# Altium PCB LPCB222R0.PcbDoc
Units mm, origin at the board's own origin, x right, y up, seen from the top; angles counter-clockwise.
Board outline 58 x 58 mm, 2 copper layers (Top Layer, Bottom Layer); 35 components, 25 nets, 97 pads, 26 vias.
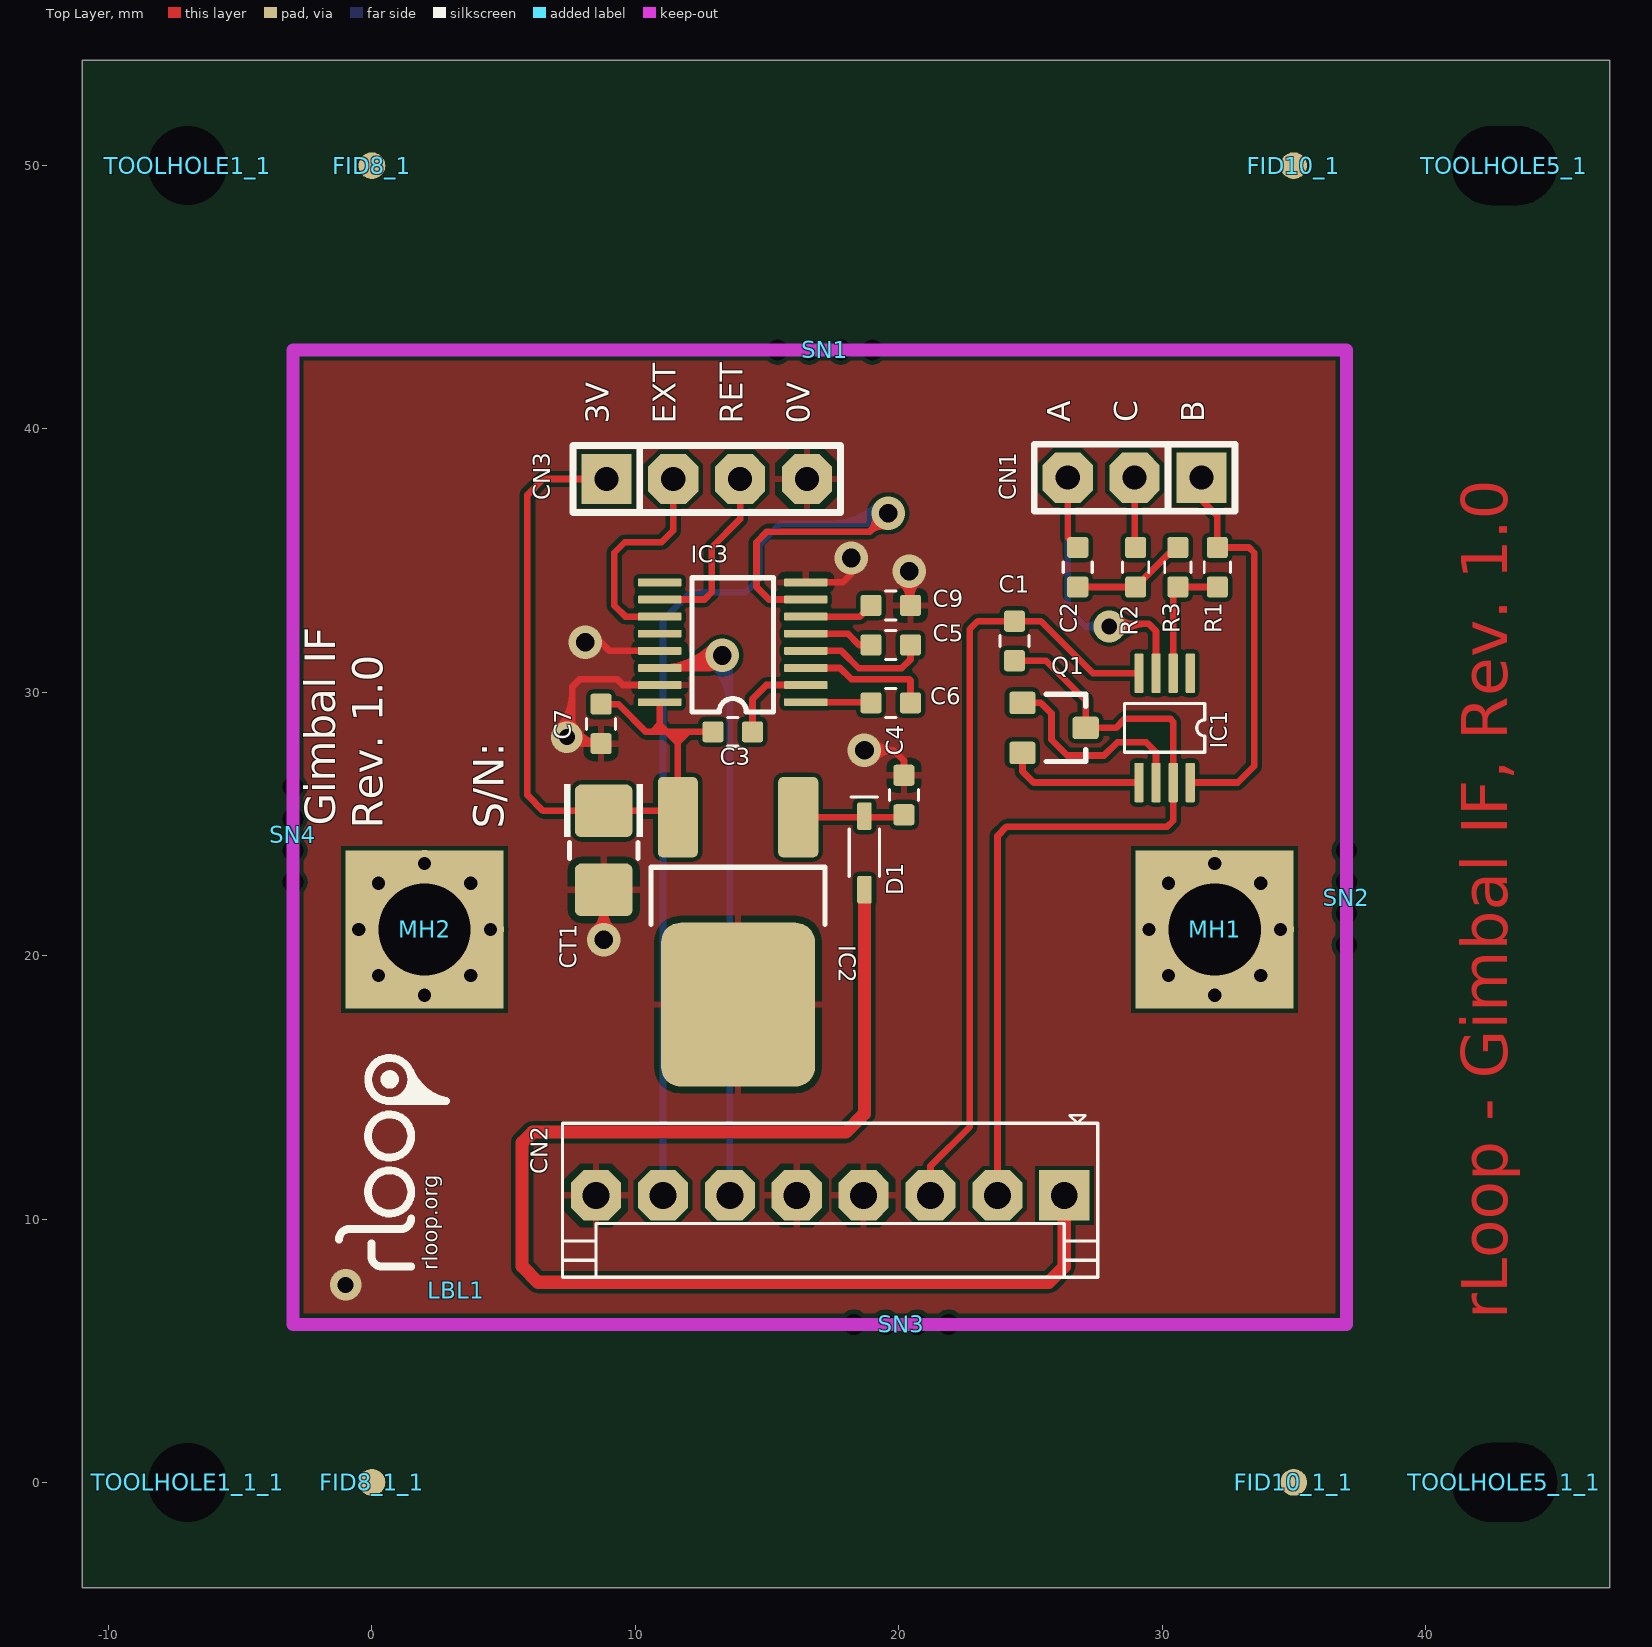
[diagram p0: Top Layer view]
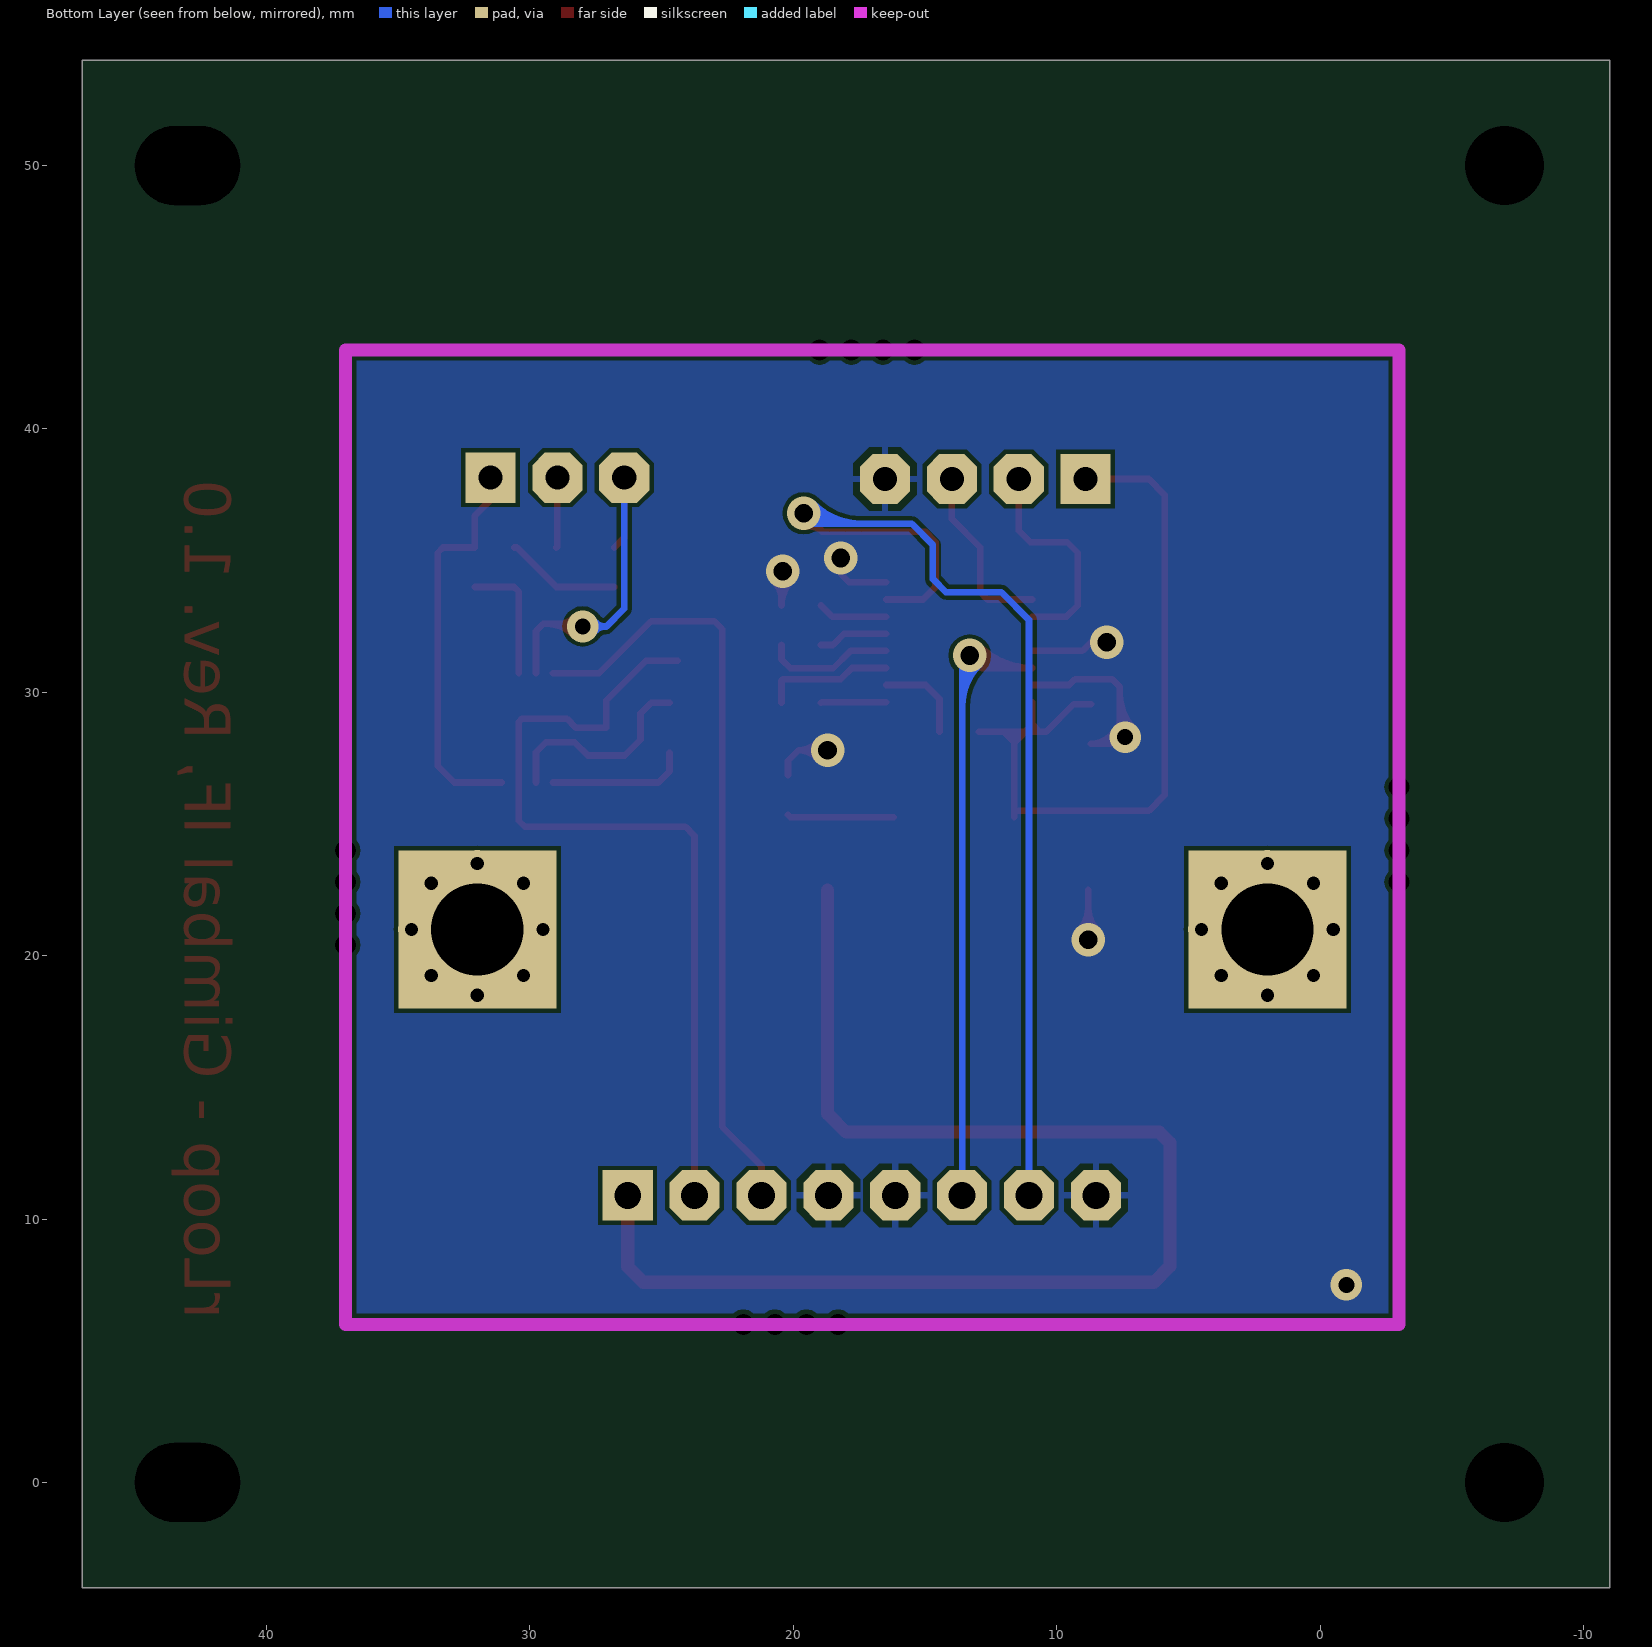
[diagram p1: Bottom Layer view, seen from below]

## Layer stack, top to bottom
Top Layer: signal copper 0.0356
Dielectric: core 0.32, FR-4, Dk 4.8
Bottom Layer: signal copper 0.0356

## Board outline
-11,-4 47,-4 47,54 -11,54

## Design rules (kind name [scope] priority, off if disabled: settings)
Clearance [All] p1: gap=0.16
HoleSize [All] p1: absolutevalues=TRUE maxlimit=5 minlimit=0.025 maxpercent=80.000 minpercent=20.000
MinimumSolderMaskSliver [All] p1 off: minsoldermaskwidth=0.1
PlaneClearance [All] p1: clearance=0.6
PolygonConnect [IsVia] p1: connectstyle=Direct reliefconductorwidth=0.254 reliefentries=4 polygonreliefangle="90 Angle" airgapwidth=0.254
PolygonConnect PolygonConnect_1 [All] p2: connectstyle=Relief reliefconductorwidth=0.254 reliefentries=4 polygonreliefangle="90 Angle" airgapwidth=0.254
RoomDefinition "U_LPCB222 - LINEAR POT" [InComponentClass('U_LPCB222 - LINEAR POT')] p1: confinementstyle=ConfineIn formatcopy=TRUE lockcomponents=FALSE outline 23.3,25.25 33.4,25.25 33.4,41.15 23.3,41.15
RoomDefinition "LPCB222 - OVERVIEW" [InComponentClass('LPCB222 - OVERVIEW')] p2: confinementstyle=ConfineIn formatcopy=TRUE lockcomponents=FALSE outline 54.189,-2.579 60.789,-2.579 60.789,20.721 54.189,20.721
RoomDefinition "U_LPCB222 - SWITCH INTERFACE" [InComponentClass('U_LPCB222 - SWITCH INTERFACE')] p3: confinementstyle=ConfineIn formatcopy=TRUE lockcomponents=FALSE outline 5.906,14.3 22.9,14.3 22.9,41.1 5.906,41.1
RoutingVias [All] p1: holewidth=0.6 width=1.2 viastyle="Through Hole" minholewidth=0.6 minwidth=1.2 maxholewidth=1 maxwidth=3
SilkToSilkClearance [All] p1 off: silktosilkclearance=0.254
SilkToSolderMaskClearance [IsPad] p1 off: minsilkscreentomaskgap=0.254 clearancetoexposedcopper=TRUE
SolderMaskExpansion [All] p1: expansion=0.102
Width [All] p1: maxlimit=2 minlimit=0.254 preferedwidth=0.254
23 further rules are at their usual default settings.

## Classes and differential pairs
component class "LPCB222 - OVERVIEW": CN2 LBL1 MH1 MH2 SN1 SN2 SN3 SN4
component class "U_LPCB222 - LINEAR POT": C1 C2 CN1 IC1 Q1 R1 R2 R3
component class "U_LPCB222 - SWITCH INTERFACE": C3 C4 C5 C6 C7 C9 CN3 CT1 D1 IC2 IC3

## Components (designator, comment, footprint, x,y, rotation, side; value= is the part's Value field where it differs from the comment)
C1 "100n / 50V / 10% / SMD 0603" LFP011__CC1608-0603-IPC7351_B 24.4,31.95 r90 top
C2 "100n / 50V / 10% / SMD 0603" LFP011__CC1608-0603-IPC7351_B 26.8,34.75 r90 top
C3 "100n / 50V / 10% / SMD 0603" LFP011__CC1608-0603-IPC7351_B 13.7,28.5 r0 top
C4 "100n / 50V / 10% / SMD 0603" LFP011__CC1608-0603-IPC7351_B 20.2,26.1 r90 top
C5 "100n / 50V / 10% / SMD 0603" LFP011__CC1608-0603-IPC7351_B 19.7,31.8 r180 top
C6 "100n / 50V / 10% / SMD 0603" LFP011__CC1608-0603-IPC7351_B 19.7,29.6 r0 top
C7 "100n / 50V / 10% / SMD 0603" LFP011__CC1608-0603-IPC7351_B 8.7,28.8 r270 top
C9 "100n / 50V / 10% / SMD 0603" LFP011__CC1608-0603-IPC7351_B 19.7,33.3 r0 top
CN1 "HDR-3X1" HDR-3X1 31.5,38.15 r180 top
CN2 "640456-8" 640456-8 17.4,10.9 r180 top
CN3 "HDR-4X1" HDR-4X1 8.9,38.1 r0 top
CT1 "22uF / 16V / 20% / SMD BCASE" LFP018__TC3528 8.8,24 r270 top
D1 "1N4148WS" LFP001__SOD-323F 18.7,23.9 r270 top
FID8_1 "FIDUCIAL" FIDTOP 0,50 r0 top
FID8_1_1 "FIDUCIAL" FIDTOP 0,0 r0 top
FID10_1 "FIDUCIAL" FIDTOP 35,50 r0 top
FID10_1_1 "FIDUCIAL" FIDTOP 35,0 r0 top
IC1 "XTR117AIDGKR" LFP015__UMAX8 30.1,28.65 r180 top
IC2 "NCV4274DT33RKG" LFP019__369A-13 13.9,20.7 r180 top
IC3 "MAX3232CPWR" LFP049__TSSOP-16 13.7,31.9 r90 top
LBL1 "RLOOP_LOGO" RLOOP_LOGO 3.2,7.3 r90 top
MH1 "MOUNTING_HOLE_3MM_SQ" MOUNTING_HOLE_3MM_SQ 32,21 r0 top
MH2 "MOUNTING_HOLE_3MM_SQ" MOUNTING_HOLE_3MM_SQ 2,21 r0 top
Q1 "MMBT3904" LFP021__SOT23 25.9,28.65 r270 top
R1 "121K / 0.1W / 1% / SMD 0603" LFP020__CR1608-0603-IPC7351_B 32.1,34.75 r90 top
R2 "10K / 0.1W / 1% / SMD 0603" LFP020__CR1608-0603-IPC7351_B 29,34.75 r270 top
R3 "10K / 0.1W / 1% / SMD 0603" LFP020__CR1608-0603-IPC7351_B 30.6,34.75 r270 top
SN1 "PCB_SNAPOUT" SNAPOUT_NEW 19,43 r180 top
SN2 "PCB_SNAPOUT" SNAPOUT_NEW 37,20.4 r90 top
SN3 "PCB_SNAPOUT" SNAPOUT_NEW 21.9,6 r180 top
SN4 "PCB_SNAPOUT" SNAPOUT_NEW -3,22.8 r90 top
TOOLHOLE1_1 "Comment" TOOL-1#1 -7,50 r0 top
TOOLHOLE1_1_1 "Comment" TOOL-1#1 -7,0 r0 top
TOOLHOLE5_1 "Comment" TOOL-1#2 43,50 r0 top
TOOLHOLE5_1_1 "Comment" TOOL-1#2 43,0 r0 top

## Footprints (in the part's own frame and the unit in brackets; to place one, negate y for a bottom-side part, rotate by r counter-clockwise, add the part's x,y. Pads: shape width x height; smd on the part's side, far side on the other; paste and mask are expansions set on the pad)
640456-8 [mm] "Connector, Male Header, 8 Way"
  rect 1.905x1.905 hole 1.02: 1(-8.89,0)
  oct 1.905x1.905 hole 1.02: 2(-6.35,0) 3(-3.81,0) 4(-1.27,0) 5(1.27,0) 6(3.81,0) 7(6.35,0) 8(8.89,0)
  silkscreen extent -10.15,-3.04 10.17,3.1
FIDTOP [mil]
  round 40 smd mask+39.37: 1(0,0)
HDR-3X1 [mil]
  rect 75x75 hole 36: 1(0,0)
  oct 75x75 hole 36: 2(100,0) 3(200,0)
  silkscreen extent -50,-50 250,50
HDR-4X1 [mil]
  rect 75x75 hole 36: 1(0,0)
  oct 75x75 hole 36: 2(100,0) 3(200,0) 4(300,0)
  silkscreen extent -50,-50 350,50
LFP001__SOD-323F [mm] "Component Footprint, SOD-232F (SOD-323/SC-76; 2 Leads; Body 1.7 x 1.3 mm, (LxW))"
  rrect25% 1.05x0.55 smd: 1(-1.4,0) 2(1.4,0)
  silkscreen extent -2.13,-0.58 0.9,0.58
LFP011__CC1608-0603-IPC7351_B [mm]
  rrect25% 0.8x0.8 smd: 1(-0.75,0) 2(0.75,0)
  silkscreen extent -0.2,-0.55 0.2,0.55
LFP015__UMAX8 [mm] "Shrink Small Outline; 8 Leads; Body Width 3 mm; Pitch 0.65 mm"
  rrect25% 0.35x1.5 smd paste-0.03: 1(-0.975,-2.075) 2(-0.325,-2.075) 3(0.325,-2.075) 4(0.975,-2.075) 5(0.975,2.075) 6(0.325,2.075) 7(-0.325,2.075) 8(-0.975,2.075)
  silkscreen extent -1.53,-0.92 1.52,0.92
LFP018__TC3528 [mm]
  rrect25% 2x2.2 smd: 1(-1.5,0) 2(1.5,0)
  silkscreen extent -2.51,-1.5 0.3,1.5
LFP019__369A-13 [mil]
  rrect25% 60x120 smd: 1(-90,-179.49) 3(90,-179.49)
  rrect25% 230x245 smd paste-196.85: 4(0,100.75)
  silkscreen extent -130,-104 130,-19
LFP020__CR1608-0603-IPC7351_B [mm]
  rrect25% 0.8x0.8 smd: 1(-0.75,0) 2(0.75,0)
  silkscreen extent -0.2,-0.5 0.2,0.5
LFP021__SOT23 [mm] "SOT-23; 3 Leads; Body 3.0 x 2.5 mm, inc. leads (LxW max)"
  rrect25% 0.85x1 smd paste-0.05: 1(-0.95,-1.2) 2(0.95,-1.2) 3(0,1.2)
  silkscreen extent -1.27,-0.3 1.28,1.2
LFP049__TSSOP-16 [mm] "Copied from 984E-02"
  rrect25% 0.3x1.65 smd paste-0.03: 1(-2.275,-2.775) 2(-1.625,-2.775) 3(-0.975,-2.775) 4(-0.325,-2.775) 5(0.325,-2.775) 6(0.975,-2.775) 7(1.625,-2.775) 8(2.275,-2.775) 9(2.275,2.775) 10(1.625,2.775) 11(0.975,2.775) 12(0.325,2.775) 13(-0.325,2.775) 14(-0.975,2.775) 15(-1.625,2.775) 16(-2.275,2.775)
  silkscreen extent -2.65,-1.55 2.45,1.55
MOUNTING_HOLE_3MM_SQ [mm] "Non-plated mounting hole for 3mm screw"
  rect 6x6 hole 3.5 mask+0.051: MOUNT(0,0)
RLOOP_LOGO [mm]
  silkscreen extent 0.89,0.39 8.82,4.45
SNAPOUT_NEW [mm]
  round 0.4 hole 0.8 unplated: 0(0,0) 0(1.2,0) 0(2.4,0) 0(3.6,0)
TOOL-1#1 [mm]
  round 2.54 hole 3 unplated: TOOL(0,0)
TOOL-1#2 [mm]
  round 0.076 hole 3 slot 4 at 0 deg unplated: TOOL1(0,0)

## Part data
C1 C2 C3 C5 C6 C9: "Capacitor, Ceramic Chip, 100nF (0.1uF), 50V, 5%, SMD 0603 [LCA016]"
C4 C7: "Capacitor, Ceramic Chip, 100nF, 50V, 10%, SMD 0603"
CN1: "Header, 2.54mm (0.1in), 3 Pins x 1 Row (40 Per Row In Strip)"
CN2: "Connector, Male Header, 8 Way"
CN3: "Header, 2.54mm (0.1in), 4 Pins x 1 Row (40 Per Row In Strip)"
CT1: "Capacitor, Tantalum, 22uF, 16V, 20%, SMD B-Case"
D1: "Diode, Small Signal, SMD SOD-323F"
IC1: "IC, 4-20mA Current Loop Transmitter, SMD SOIC8 [LIC588]"
IC2: "IC, Voltage Regulator, 400mA, 3.3V LDO, SMD DPAK [LIC233]"
IC3: "IC, RS232 Line Driver, 3.3V, SMD TSSOP16 [LIC165]"
MH1 MH2: "3MM Mouting Hole, Square"
Q1: "Transistor, NPN, General Purpose, SOT-23 [LIC005]"
R1: "Resistor, Ceramic Chip, 121K, 0.1W, SMD 0603 [LRE212]"
R2 R3: "Resistor, Ceramic Chip, 10K, 0.1W, 1%, SMD 0603 [LRE030]"

## Via types
v1: diameter 1.016, hole 0.5, Top Layer to Bottom Layer, tented both sides, 16 vias
v2: diameter 1.27, hole 0.711, Top Layer to Bottom Layer, 7 vias
v3: diameter 1.2, hole 0.6, Top Layer to Bottom Layer, 3 vias

## Nets (pads, with @x,y where several pads share a name; then routed paths per layer and width w, separated by ;. In a path a pad name is that pad's centre, name@x,y a point inside that pad or via, vN(x,y) a via of type N, cw(c..) or ccw(c..) an arc to the next point about the centre after c; other vN are vias at no path point)
D3V3: C3.1 C7.1 CN3.1 CT1.1 IC2.3 IC3.16 | length 31.6
  Top Layer w0.254: C7.1 9.35,29.55 10.4,28.5 10.65,28.5 ; CN3.1 6.5,38.1 5.9,37.5 5.9,26.1 6.5,25.5 CT1.1 IC2.3@11.614,25.5 ; IC3.16 10.925,28.775 ; IC2.3 IC2.3@11.614,25.5 ; C3.1 12,28.5 ; 10.65,28.5 10.925,28.775 ; 10.65,28.5 10.9,28.5 ; 10.9,28.5 10.925,28.525 10.925,28.775 ; 10.9,28.5 11.2,28.5 ; 10.925,28.775 11.2,28.5 ; 11.2,28.5 11.7,28.5 ; 11.2,28.5 11.6,28.1 ; 11.6,28.1 11.614,28.1 ; 11.6,28.1 11.614,28.114 ; IC2.3@11.614,25.5 11.614,28.1 ; 11.614,28.1 11.614,28.114 ; 11.614,28.114 12,28.5 ; 11.614,28.114 11.614,28.414 11.7,28.5 ; 11.7,28.5 12,28.5
DGND: C4.2 C7.2 C9.2 CN2.4 CN2.5 CN2.8 CN3.4 CT1.2 IC2.4 IC3.8 IC3.13 IC3.15 | length 28.1
  Top Layer w0.254: v3@7.066,28.634 ccw(c5.775,29.925) 7.6,29.925 ; v3@7.245,28.455 ccw(c6.388,29.312) 7.6,29.312 ; v3@7.586,28.416 ccw(c8.243,28.824) 8.243,28.05 ; 7.6,28.959 ccw(c8.059,28.959) v3@7.734,28.634 ; v3@7.802,28.55 ccw(c8.7,29.107) C7.2 7.95,28.05 7.6,28.4 7.6,30.2 7.9,30.5 9.3,30.5 9.525,30.275 IC3.15 ; v2(8.1,31.9) 8.7,31.9 9.025,31.575 IC3.13 ; v2@8.441,20.959 ccw(c7.574,21.826) 8.8,21.826 ccw(c10.026,21.826) v2@9.159,20.959 ; v2(8.8,20.6) CT1.2 ; IC3.8 17.875,34.175 18.2,34.5 v2(18.2,35.1) ; v2(18.7,27.8) 19.8,27.8 ; v2@19.087,27.471 cw(c19.8,26.863) 19.8,27.8 ; v2@19.087,28.129 ccw(c19.8,28.737) 19.8,27.8 ; v2@20.05,34.232 cw(c19.163,33.299) C9.2 ; C4.2 20.2,27.4 19.8,27.8 ; v2@20.225,34.416 cw(c19.726,33.891) 20.45,33.891 ; v2(20.4,34.6) 20.45,34.55 C9.2 ; C9.2@20.45,33.494 cw(c21.506,33.494) v2@20.759,34.241
  other v3: -1,7.5 7.4,28.3
EXTEND_IN: CN3.2 IC3.11 | length 8.4
  Top Layer w0.254: IC3.11 9.625,32.875 9.2,33.3 9.2,35.3 9.6,35.7 11,35.7 11.44,36.14 CN3.2
EXTEND_OUT: CN2.6 IC3.14 | length 33.5
  Top Layer w0.254: IC3.14 12.825,30.925 ; IC3.14@10.927,30.925 ccw(c10.927,33.773) v2@12.941,31.759 ; IC3.14@11.54,30.925 ccw(c11.54,33.16) v2@13.12,31.58 ; 12.153,30.925 ccw(c12.153,32.547) v2(13.3,31.4) 12.825,30.925 ; 12.766,30.925 ccw(c12.766,31.934) v2@13.48,31.22 ; v2@12.857,31.152 cw(c12.691,31.059) 12.825,30.925 ; v2@13.052,30.957 ccw(c12.959,30.791) 12.825,30.925
  Bottom Layer w0.254: v2@12.941,31.041 cw(c11.373,29.473) 13.59,29.473 ; v2@13.12,31.22 cw(c11.987,30.087) 13.59,30.087 ; CN2.6 13.59,31.11 v2(13.3,31.4) cw(c12.6,30.7) 13.59,30.7
ISO1: MH1.MOUNT
  other v1: 32,18.5 30.25,19.25 33.75,19.25 29.5,21 34.5,21 30.25,22.75 33.75,22.75 32,23.5
ISO2: MH2.MOUNT
  other v1: 2,18.5 0.25,19.25 3.75,19.25 -0.5,21 4.5,21 0.25,22.75 3.75,22.75 2,23.5
NetC1_1: C1.1 CN2.2 IC1.7 Q1.3 | length 32.2
  Top Layer w0.254: CN2.2 23.75,24.55 24.1,24.9 30.2,24.9 30.425,25.125 IC1.7 30.425,28.875 30.3,29 28.6,29 28.25,28.65 Q1.3 27.1,29.7 25.6,31.2 C1.1
NetC1_2: C1.2 CN2.3 IC1.4 | length 29.5
  Top Layer w0.254: CN2.3 21.21,12.01 22.7,13.5 22.7,32.4 23,32.7 C1.2 25.4,32.7 27.375,30.725 IC1.4
NetC2_1: C2.1 R2.2 R3.1 | length 4.4
  Top Layer w0.254: C2.1 R2.2 30.5,35.5 R3.1
NetC2_2: C2.2 CN1.3 IC1.3 | length 16.9
  Top Layer w0.254: CN1.3 26.42,35.88 C2.2 ; v3@28,32.8 28.2,32.6 29.5,32.6 29.775,32.325 IC1.3 ; v3@28.155,32.345 cw(c28.77,31.73) 28.77,32.6 ; v3@28.334,32.166 cw(c29.383,31.117) 29.383,32.6 ; v3@28.334,32.834 ccw(c28.9,33.4) 28.9,32.6
  Bottom Layer w0.254: CN1.3 26.42,33.18 27.1,32.5 ; v3@27.61,32.232 ccw(c27.1,31.88) 27.1,32.5 ; v3@27.61,32.768 cw(c27.1,33.12) 27.1,32.5 ; v3(28,32.5) 27.1,32.5
NetC3_2: C3.2 IC3.2 | length 3.5
  Top Layer w0.254: C3.2 14.45,29.75 14.975,30.275 IC3.2
NetC4_1: C4.1 D1.1 IC2.1 | length 4.1
  Top Layer w0.254: IC2.1 20.109,25.259 C4.1
NetC5_1: C5.1 IC3.4 | length 4.9
  Top Layer w0.254: IC3.4 17.825,31.575 18.486,30.914 20.114,30.914 20.45,31.25 C5.1
NetC5_2: C5.2 IC3.5 | length 2.7
  Top Layer w0.254: IC3.5 18.075,32.225 18.5,31.8 C5.2
NetC6_1: C6.1 IC3.1 | length 2.5
  Top Layer w0.254: IC3.1 18.925,29.625 C6.1
NetC6_2: C6.2 IC3.3 | length 5
  Top Layer w0.254: IC3.3 17.775,30.925 18.2,30.5 20.4,30.5 20.45,30.45 C6.2
NetC9_1: C9.1 IC3.6 | length 2.7
  Top Layer w0.254: IC3.6 18.525,32.875 C9.1
NetCN1_1: CN1.1 IC1.8 R1.2 | length 15.2
  Top Layer w0.254: IC1.8 32.875,26.575 33.5,27.2 33.5,35.3 33.3,35.5 R1.2 32.1,36.7 31.5,37.3 CN1.1
NetCN1_2: CN1.2 R2.1 | length 2.7
  Top Layer w0.254: CN1.2 28.96,35.54 R2.1
NetIC1_2: IC1.2 R1.1 R3.2 | length 4.8
  Top Layer w0.254: IC1.2 30.425,33.825 R3.2 R1.1
NetIC1_5: IC1.5 Q1.2 | length 5.3
  Top Layer w0.254: Q1.2 24.7,27 25.125,26.575 IC1.5
NetIC1_6: IC1.6 Q1.1 | length 8
  Top Layer w0.254: Q1.1 25.4,29.6 25.8,29.2 25.8,28.2 26.4,27.6 27.8,27.6 28.3,28.1 29.4,28.1 29.775,27.725 IC1.6
P24V: CN2.1 D1.2 | length 50.4
  Top Layer w0.5: D1.2 18.7,14 18,13.3 6.1,13.3 5.7,12.9 5.7,8.2 6.3,7.6 25.7,7.6 26.29,8.19 CN2.1
RETRACT_IN: CN3.3 IC3.10 | length 6.8
  Top Layer w0.254: IC3.10 12.625,33.525 12.9,33.8 12.9,35.5 13.98,36.58 CN3.3
RETRACT_OUT: CN2.7 IC3.7 | length 48.1
  Top Layer w0.254: IC3.7 15.075,33.525 14.6,34 14.6,35.7 15,36.1 18.9,36.1 ; v2@19.099,36.718 cw(c18.398,36.602) 18.9,36.1 ; v2@19.518,36.299 ccw(c19.402,35.598) 18.9,36.1 ; v2(19.6,36.8) 18.9,36.1
  Bottom Layer w0.254: CN2.7 11.05,32.75 12.1,33.8 14.2,33.8 14.7,34.3 14.7,35.6 15.5,36.4 19.2,36.4 v2(19.6,36.8) cw(c18.634,37.766) 18.634,36.4 ; 17.408,36.4 ccw(c17.408,38.992) v2@19.241,37.159 ; 18.021,36.4 ccw(c18.021,38.379) v2@19.42,36.98
pads on no net: FID8_1.1 FID8_1_1.1 FID10_1.1 FID10_1_1.1 IC1.1 IC3.9 IC3.12 SN1.0 SN2.0 SN3.0 SN4.0 TOOLHOLE1_1.TOOL TOOLHOLE1_1_1.TOOL TOOLHOLE5_1.TOOL1 TOOLHOLE5_1_1.TOOL1

## Polygon pours and split planes (outlines as drawn)
DGND on Bottom Layer "Bottom Layer-No Net" (solid, remove dead copper, pour order 4): -3,43 37,43 37,6 36.9,6.1 -2.8,6.1 -2.9,6.1 -3,6
DGND on Top Layer "Bottom Layer-No Net" (solid, remove dead copper, pour order 3): -3,43 37,43 37,6 36.9,6.1 -2.8,6.1 -2.9,6.1 -3,6

## Keep-outs
Keep-Out Layer:
  lines w0.5: -3,6 -3,43 37,43 37,6 -3,6

## Other copper
Top Layer:
  text "rLoop - Gimbal IF, Rev. 1.0" at 43.7,6.2 h3 r90

## Silkscreen, mask and mechanical layers (free items; w line width, h text height)
Top Overlay:
  text "A" at 26.82,40.25 h1.5 r90
  text "C" at 29.36,40.25 h1.5 r90
  text "B" at 31.9,40.25 h1.5 r90
  text "3V" at 9.3,40.2 h1.5 r90
  text "EXT" at 11.84,40.2 h1.5 r90
  text "RET" at 14.38,40.2 h1.5 r90
  text "0V" at 16.92,40.2 h1.5 r90
  text "Gimbal IF" at -0.99,24.925 h2 r90
  text "Rev. 1.0" at 0.81,24.825 h2 r90
  text "S/N:" at 5.41,24.825 h2 r90
Mechanical 1:
  lines w0.1: -11,-4 47,-4 47,54 -11,54 -11,-4
  lines w0.127: -3,6 37,6 37,43 -3,43 -3,6
Mechanical 3:
  lines w2.4: -4.2,21.6 -4.2,4.8 17.4,4.8 ; -4.2,27.6 -4.2,44.2 13.2,44.2 ; 20.4,44.2 38.2,44.2 38.2,25.2 ; 23.4,4.8 38.2,4.8 38.2,19.2

## Text inside footprints (layer, text, board x,y; h text height)
LBL1: Top Overlay "rloop.org" at 2.7,8.05 h1 r90